# EAGLE board Płytka (EAGLE 9.6.2)
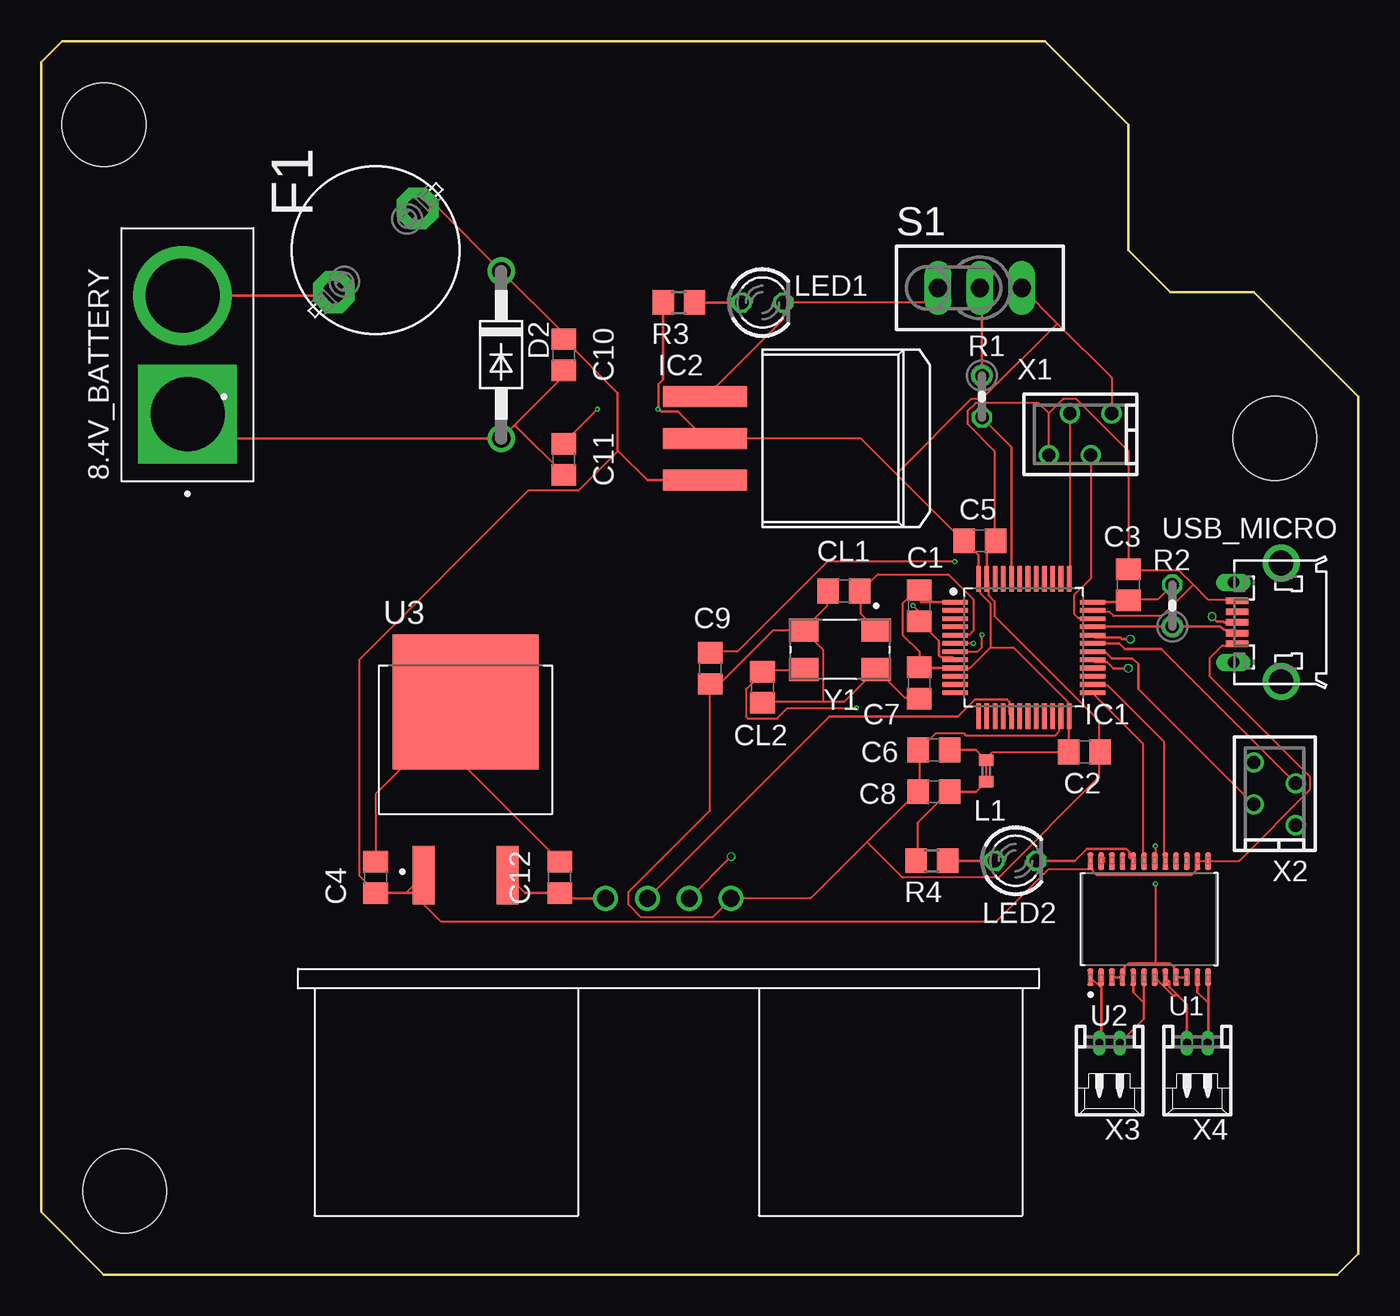
[diagram p0: board, top side]
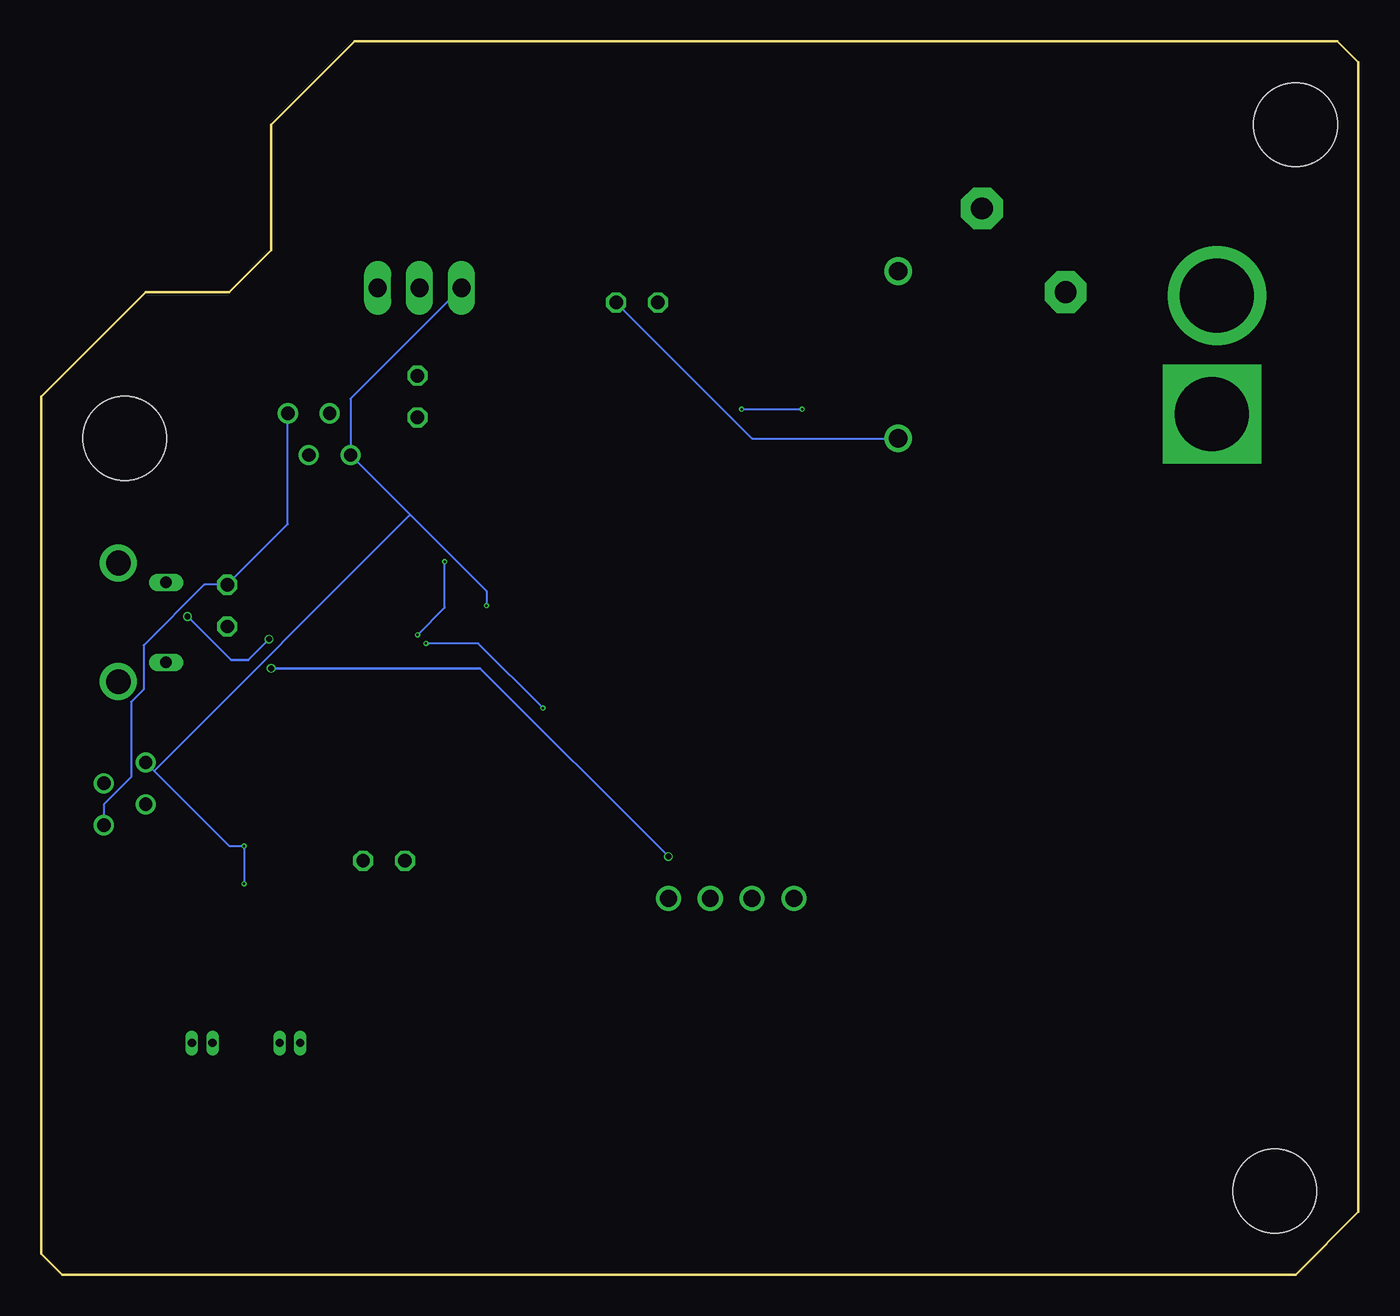
[diagram p1: board, bottom side, seen from below]

Size 80.01 x 74.93 mm. Coordinates in mm from the lower left corner, seen from the top.
Outline: 0,73.66 0,3.81 3.81,0 78.74,0 80.01,1.27 80.01,53.34 73.66,59.69 68.58,59.69 66.04,62.23 66.04,69.85 60.96,74.93 1.27,74.93 0,73.66
Copper layers (1*16): Top 0.035559375mm / dielectric 1.6mm / Bottom 0.035559375mm
Design rules "jlcpcb2layer *": minimum track width 5mil, minimum drill 0.15mm, track to track 5mil, track to pad 0.2mm, pad to pad 0.5mm, via to via 10mil, smd to smd 5mil, copper to edge 8mil, drill to drill 0.5mm, minimum pad ring 5mil, minimum via ring 3mil, stop-mask expansion 2.5mil, vias tented up to drill 0mil, thermal gap 10mil
Holes 5.08 mm at 5.08,5.08 3.81,69.85 74.93,50.8

## Footprints (pad centres in the part's own frame; a part is rotated, then mirrored left to right if it is on the bottom)
AMASS_XT60PB-M = drill 4.5 pad 6 square: 1 -3.6,0 | drill 4.5 pad 6: 2 3.6,0.305
C0805 = smd 1.3 x 1.5: 1 -0.95,0; 2 0.95,0
DO41-10 = drill 1.118: A 5.08,0; C -5.08,0
19559 = drill 1.321 pad 2.54 octagon: 1 -2.54,2.54; 2 2.54,-2.54
QFP50P900X900X160-48N = smd 1.559 x 0.28: 1 -4.178,2.75; 2 -4.178,2.25; 3 -4.178,1.75; 4 -4.178,1.25; 5 -4.178,0.75; 6 -4.178,0.25; 7 -4.178,-0.25; 8 -4.178,-0.75; 9 -4.178,-1.25; 10 -4.178,-1.75; 11 -4.178,-2.25; 12 -4.178,-2.75; 25 4.178,-2.75; 26 4.178,-2.25; 27 4.178,-1.75; 28 4.178,-1.25; 29 4.178,-0.75; 30 4.178,-0.25; 31 4.178,0.25; 32 4.178,0.75; 33 4.178,1.25; 34 4.178,1.75; 35 4.178,2.25; 36 4.178,2.75 | smd 0.28 x 1.559: 13 -2.75,-4.178; 14 -2.25,-4.178; 15 -1.75,-4.178; 16 -1.25,-4.178; 17 -0.75,-4.178; 18 -0.25,-4.178; 19 0.25,-4.178; 20 0.75,-4.178; 21 1.25,-4.178; 22 1.75,-4.178; 23 2.25,-4.178; 24 2.75,-4.178; 37 2.75,4.178; 38 2.25,4.178; 39 1.75,4.178; 40 1.25,4.178; 41 0.75,4.178; 42 0.25,4.178; 43 -0.25,4.178; 44 -0.75,4.178; 45 -1.25,4.178; 46 -1.75,4.178; 47 -2.25,4.178; 48 -2.75,4.178
DD-3 = smd 1.27 x 5.08: 1 -2.54,-7.938; 2 0,-7.938; 3 2.54,-7.938
0402 = smd 0.7 x 0.9: 1 -0.65,0; 2 0.65,0
LED3MM = drill 0.813 octagon: A -1.27,0; K 1.27,0
0204V = drill 0.813 octagon: 1 -1.27,0; 2 1.27,0
R0805 = smd 1.3 x 1.5: 1 -0.95,0; 2 0.95,0
TL3XPO = drill 1.1 pad 1.422 long: 1 -2.54,0; 2 0,0; 3 2.54,0
SSOP-24 = smd 1.06 x 0.37: 1 -3.525,3.575; 2 -3.525,2.925; 3 -3.525,2.275; 4 -3.525,1.625; 5 -3.525,0.975; 6 -3.525,0.325; 7 -3.525,-0.325; 8 -3.525,-0.975; 9 -3.525,-1.625; 10 -3.525,-2.275; 11 -3.525,-2.925; 12 -3.525,-3.575; 13 3.525,-3.575; 14 3.525,-2.925; 15 3.525,-2.275; 16 3.525,-1.625; 17 3.525,-0.975; 18 3.525,-0.325; 19 3.525,0.325; 20 3.525,0.975; 21 3.525,1.625; 22 3.525,2.275; 23 3.525,2.925; 24 3.525,3.575
XCVR_HC-SR04 = drill 1.02: 1 -3.81,0; 2 -1.27,0; 3 1.27,0; 4 3.81,0
D2PAK = smd 1.33 x 3.57: 1 -2.54,-6.47; 3 2.54,-6.47 | smd 8.87 x 8.19: 2 0,4.06
ZX62D-B-5PA8 = smd 1.35 x 0.4: 1 4.825,1.3; 2 4.825,0.65; 3 4.825,0; 4 4.825,-0.65; 5 4.825,-1.3 | drill 1.5: S1 2.15,-3.6; S2 2.15,3.6 | drill 0.7 long: S3 5.05,2.425; S4 5.05,-2.425
MTOP-4 = drill 0.813: 1 1.905,1.27; 2 0.635,-1.27; 3 -0.635,1.27; 4 -1.905,-1.27
53048-02 = drill 0.5 pad 0.698 long: 1 0.625,-1.25; 2 -0.625,-1.25
XTAL_ABMM2-8.0000MHZ-E1-T = smd 1.4 x 1.8: 1 -1.2,2.2; 2 -1.2,-2.2; 3 1.2,-2.2; 4 1.2,2.2

## Placement (x,y rotation side)
8.4V_BATTERY  XT60_PLUG  [AMASS_XT60PB-M]  8.89,55.88 90 top
C1  100nF  [C0805]  53.34,40.64 270 top
C2  100nF  [C0805]  63.37,31.75 0 top
C3  100nF  [C0805]  66.04,41.91 90 top
C4  0.33uF  [C0805]  20.32,24.13 90 top
C5  4.7uF  [C0805]  57.02,44.58 0 top
C6  1uF  [C0805]  54.23,31.88 180 top
C7  10nF\  [C0805]  53.34,35.94 270 top
C8  1uF  [C0805]  54.23,29.34 180 top
C9  0.1uF  [C0805]  40.64,36.83 270 top
C10  10uF  [C0805]  31.75,55.88 270 top
C11  10uF  [C0805]  31.75,49.53 270 top
C12  0.33uF  [C0805]  31.5,24.13 90 top
CL1  3pF  [C0805]  48.77,41.53 0 top
CL2  3pF  [C0805]  43.81,35.69 90 top
D2  [DO41-10]  27.94,55.88 270 top
F1  [19559]  20.32,62.23 90 top
IC1  STM32F103C6  [QFP50P900X900X160-48N]  59.69,38.1 0 top
IC2  REG1117F  [DD-3]  48.26,50.8 270 top
L1  BLM15HB121SN1  [0402]  57.4,30.61 270 top
LED1  RED  [LED3MM]  43.81,59.05 0 top
LED2  RED  [LED3MM]  59.18,25.15 0 top
R1  10k  [0204V]  57.15,53.34 270 top
R2  1k5  [0204V]  68.71,40.64 90 top
R3  1k5  [R0805]  38.73,59.05 180 top
R4  1k5  [R0805]  54.1,25.15 180 top
S1  TL32PO  [TL3XPO]  57.02,59.94 0 top
U1  TB6612FNG,C,8,EL  [SSOP-24]  67.31,21.59 90 top
U2  HC-SR04  [XCVR_HC-SR04]  38.1,22.86 0 top
U3  MC7805ACD2TG  [D2PAK]  25.78,30.73 0 top
USB_MICRO  ZX62D-B-5PA8  [ZX62D-B-5PA8]  77.47,39.62 180 top
X1  [MTOP-4]  63.12,51.05 180 top
X2  [MTOP-4]  74.93,29.21 90 top
X3  MOTOR1  [53048-02]  64.9,12.83 180 top
X4  MOTOR2  [53048-02]  70.23,12.83 180 top
Y1  8MHz  [XTAL_ABMM2-8.0000MHZ-E1-T]  48.51,37.97 270 top

## Library data of the parts
8.4V_BATTERY = XT60_YELLOW; AVAILABILITY: Not in stock; DESCRIPTION: Power connector; 65A; PIN: 2; Colour: yellow; MF: Pololu; MP: XT60 YELLOW; PACKAGE: None; PRICE: None
C1-C12 CL1 CL2 = rcl; SPICEPREFIX: C
D2 = diode
F1 = fuse; MPN: 55900000001; OC_FARNELL: 9516360; OC_NEWARK: 02P0286
IC1 = IC_Embedded; CATEGORY: IC_Embedded; MANUFACTURER: ST Microelectronics; MPN: STM32F103C6T7A; OPERATING_TEMP: -40 to 105 °C; PART_STATUS: Active; SUB-CATEGORY: Microcontroller; THERMALLOSS: 0.44W
IC2 = burr-brown; MF: TEXAS INSTRUMENTS; MPN: REG1117FAKTTT; OC_FARNELL: 1296120; OC_NEWARK: 87H2562
L1 = inductors
LED1 LED2 = led
R1-R4 = rcl; SPICEPREFIX: R
S1 = switch
U1 = IC; CREATED_BY: PCBLayout.com; DIGI-KEY_PART: TB6612FNGC8ELCT-ND; MANUFACTURER: Toshiba Semiconductor and Storage; MPN: TB6612FNG,C,8,EL; PACKAGE: SSOP-24
U2 = HC-SR04; AVAILABILITY: In Stock; DESCRIPTION: HC-SR04 Ultrasonic Sensor - Platform Evaluation Expansion Board; MF: OSEPP Electronics; MP: HC-SR04; PACKAGE: None; PRICE: None; PURCHASE-URL: https://pricing.snapeda.com/search/part/HC-SR04/?ref=eda
U3 = IC; CREATED_BY: PCBLayout.com; DIGIKEY_PART_NUMBER: MC7805ACD2TGOS-ND; MANUFACTURER: ON Semiconductor; MPN: MC7805ACD2TG; PACKAGE: D2PAK
USB_MICRO = zx62d-b-5pa8-oshpark_10; MF: Hirose; MPN: ZX62D-B-5PA8; OC_FARNELL: 2300438; OC_NEWARK: 69W0712
X1 X2 = con-amp
X3 X4 = con-molex; MF: MOLEX; MPN: 53048-0210; OC_FARNELL: 1012259; OC_NEWARK: 57H4718
Y1 = ABMM2-8.0000MHZ-E1-T; AVAILABILITY: In Stock; DESCRIPTION: Crystals 8MHz 18pF 10PPM -20 +70C; MF: Abracon; MP: ABMM2-8.0000MHZ-E1-T; PACKAGE: Package; PRICE: None

## Nets
5V: C12.1 U2.1 U3.3
8.4V: 8.4V_BATTERY.2 F1.1
+3V3: C1.1 C2.1 C3.1 C5.1 C6.1 C7.1 C8.1 C11.1 IC1.1 IC1.9 IC1.24 IC1.36 IC1.48 IC2.2 L1.1 L1.2 R2.2 R3.2 R4.2 S1.3 X1.4 X2.4
AIN1: IC1.46
AIN2: IC1.45
AO1: U1.1 U1.2 X3.1
AO2: U1.5 U1.6 X3.2
BIN1: IC1.26 U1.17
BIN2: IC1.22
BO1: U1.11 U1.12 X4.2
BO2: U1.7 U1.8 X4.1
BOOT0: IC1.44 R1.2
ECHO: IC1.29 U2.3
GND: 8.4V_BATTERY.1 C1.2 C2.2 C3.2 C5.2 C6.2 C7.2 C8.2 C9.2 C10.2 C11.2 CL1.1 CL2.1 D2.A IC1.8 IC1.23 IC1.35 IC1.47 IC2.1 LED1.K S1.1 U1.3 U1.4 U1.9 U1.10 U1.18 U2.4 USB_MICRO.5 X1.1 X2.1 Y1.2 Y1.4
GND1: C4.2 C12.2 U3.2
N$2: LED1.A R3.1
N$3: U1.23
N$6: U1.22
N$7: LED2.A R4.1
N$15: U1.15
N$16: U1.16
NRST: C9.1 IC1.7
OSC_IN: CL1.2 IC1.5 Y1.1
OSC_OUT: CL2.2 IC1.6 Y1.3
PWMA: IC1.27
PWMB: IC1.28
STBY: IC1.25 U1.19
SW_BOOT0: R1.1 S1.2
SWCLK: IC1.37 X1.2
SWDID: IC1.34 X1.3
TRIG: IC1.17 U2.2
USART1_RX: IC1.31 X2.2
USART1_TX: IC1.30 X2.3
USB_D+: IC1.33 R2.1 USB_MICRO.2
USB_D-: IC1.32 USB_MICRO.3
V+: C4.1 C10.1 D2.C F1.2 IC2.3 U1.13 U1.14 U1.24 U3.1 USB_MICRO.1
VCC: LED2.K U1.20

## Tracks (layer width: path | path; a pad name or v marks a point on that pad's centre or on a via)
5V
  Top 0.152: U3.3 29.41,23.18 C12.1 31.82,22.86 U2.1
8.4V
  Top 0.152: 8.4V_BATTERY.2 17.57,59.48 F1.1
+3V3  (via drill 0.15)
  Top 0.127: X1.4 65.02,54.48 61.72,57.78 | S1.3 61.72,57.78 | R2.2 67.82,41.02 66.04,41.02 C3.1 | R4.2 53.21,25.15 53.21,27.43 55.12,29.34 C8.1 | L1.2 L1.1 57.4,31.37 57.78,31.75 C2.1 | v33.78,52.58 31.75,50.55 C11.1 | v37.47,52.58 37.51,52.59 | C7.1 53.34,37.85 52.32,38.86 52.32,40.77 52.7,41.15 53.34,41.15 C1.1 | 57.66,38.1 56.39,36.83 55.63,36.83 IC1.9 | 57.66,38.1 57.66,40.77 57.02,41.4 57.02,42.16 IC1.48 | IC2.2 49.78,50.8 51.94,48.64 | 51.94,48.64 56.01,44.58 C5.1 | 57.66,38.1 59.06,38.1 62.36,34.8 62.36,34.04 IC1.24 | 61.72,57.78 57.15,53.21 56.52,53.21 51.94,48.64
  Top 0.152: C1.1 53.45,40.85 IC1.1 | IC1.48 56.94,43.71 C5.1 | C7.1 53.38,36.85 IC1.9 | IC1.36 65.93,40.85 C3.1 | C2.1 62.42,33.16 62.44,33.18 IC1.24 | C6.1 56.78,31.88 L1.1 | C8.1 56.78,29.34 L1.2 | R3.2 37.78,54.37 37.51,54.09 37.51,52.59 37.67,52.43 38.69,52.43 IC2.2
  Bottom 0.127: X2.4 76.2,28.57 74.55,30.23 74.55,34.8 73.79,35.56 73.79,38.23 70.1,41.91 R2.2 65.02,45.59 X1.4 | v37.47,52.58 v33.78,52.58
AO1
  Top 0.152: U1.2 64.39,17.42 | 64.39,17.42 64.39,14.19 X3.1 | U1.1 64.39,17.42
AO2
  Top 0.152: U1.6 66.98,16.51 | 66.98,16.51 66.98,15.54 X3.2 | U1.5 66.33,17.16 66.98,16.51
BIN1
  Top 0.127: U1.17 68.2,25.15 68.2,32.39 64.77,35.81 63.88,35.81 IC1.26
BO1
  Top 0.152: U1.12 70.89,16.51 | 70.89,16.51 70.89,14.11 X4.2 | U1.11 70.23,17.16 70.89,16.51
BO2
  Top 0.152: U1.8 68.52,17.83 68.52,17.49 69.04,16.97 | X4.1 69.61,16.41 69.04,16.97 | U1.7 68.73,16.97 69.04,16.97
BOOT0
  Top 0.152: R1.2 58.94,50.28 IC1.44
ECHO  (via drill 0.35)
  Top 0.152: U2.3 v41.91,25.4 | IC1.29 64,37.22 64.74,37.22 65.13,36.83 v66.04,36.83
  Bottom 0.152: v41.91,25.4 53.34,36.83 v66.04,36.83
GND  (via drill 0.15)
  Top 0.127: 47.5,34.8 48.77,34.8 50.67,36.7 Y1.4 50.8,36.7 52.45,35.05 53.34,35.05 C7.2 | 47.5,34.8 43.81,34.8 CL2.1 | Y1.2 46.23,39.12 44.45,39.12 41.27,35.94 40.64,35.94 C9.2 40.64,28.19 35.69,23.24 35.69,22.48 36.45,21.72 40.77,21.72 U2.4 46.74,22.86 50.16,26.29 | CL1.1 47.75,41.53 47.75,40.64 46.36,39.24 Y1.2 | 47.5,34.8 47.5,37.97 46.36,39.12 Y1.2 | 53.34,31.88 53.34,29.34 C8.2 53.21,29.34 50.16,26.29 | 53.34,31.88 54.36,32.89 56.01,32.89 56.13,32.77 61.59,32.77 61.85,33.02 61.85,33.91 IC1.23 | 53.34,31.88 C6.2 | 28.7,51.56 28.83,51.56 31.75,48.64 C11.2 | IC2.1 40.39,53.34 45.09,58.04 LED1.K 53.59,59.05 S1.1 | 67.69,18.92 68.58,18.92 68.83,18.67 68.83,18.16 U1.9 | 67.69,18.92 66.04,18.92 65.79,18.67 65.79,18.16 U1.4 | v67.69,26.04 67.69,25.15 U1.18 | v67.69,23.75 67.69,18.92 | 64.26,31.75 64.26,33.66 57.91,40 57.91,40.89 57.53,41.27 57.53,42.16 IC1.47 | 69.98,41.91 69.09,42.8 66.04,42.8 C3.2 66.04,50.04 62.86,53.21 62.1,53.21 61.21,52.32 | 69.98,41.91 70.87,41.02 72.64,41.02 USB_MICRO.5 | 69.98,41.91 68.07,40 65.15,40 64.9,40.26 63.88,40.26 IC1.35 | C1.2 53.34,40.26 v52.96,40.64 | X1.1 61.21,52.32 | 61.21,52.32 60.58,52.96 56.77,52.96 56.26,52.45 56.26,51.69 57.91,50.04 57.91,44.58 C5.2 | 50.16,26.29 52.32,24.13 58.17,24.13 64.26,30.23 64.26,31.75 | 64.26,31.75 C2.2
  Top 0.152: 8.4V_BATTERY.1 10.37,50.8 D2.A 28.7,51.56 31.75,54.61 C10.2 | U1.3 U1.4 | U1.9 U1.10 | C5.2 57.44,44.04 IC1.47 | C1.2 54.53,38.5 54.53,37.63 54.65,37.51 55.36,37.51 IC1.8
  Bottom 0.127: D2.A 36.83,50.8 LED1.K | X2.1 73.15,30.61 | 73.15,30.61 68.58,26.04 v67.69,26.04 v67.69,23.75 | S1.1 61.21,53.21 X1.1 57.53,46.1 | v52.96,40.64 52.96,41.53 57.53,46.1 | 73.15,30.61 57.66,46.1 57.53,46.1
GND1
  Top 0.127: C4.2 20.32,29.21 23.88,32.77 | 23.88,32.77 25.78,34.67 U3.2 23.88,32.77 | 23.88,32.77 31.5,25.15 C12.2
N$2
  Top 0.152: R3.1 LED1.A
N$3
  Top 0.152: 64.57,25.11 U1.23 64.57,25.3
N$7
  Top 0.152: LED2.A R4.1
NRST  (via drill 0.15)
  Top 0.127: v55.5,43.31 47.75,43.31 42.29,37.85 40.64,37.85 C9.1 | v57.15,38.86 57.15,38.1 56.9,37.85 55.63,37.85 IC1.7
  Bottom 0.127: v55.5,43.31 55.5,40.51 v57.15,38.86
OSC_IN
  Top 0.127: 49.78,41.53 49.78,40.13 50.67,39.24 Y1.1 | 49.78,41.53 50.8,42.55 55.12,42.55 56.64,41.02 56.64,39.12 56.39,38.86 55.63,38.86 IC1.5 | 49.78,41.53 CL1.2
OSC_OUT  (via drill 0.15)
  Top 0.127: Y1.3 46.23,36.7 43.81,36.7 CL2.2 43.81,36.58 42.8,35.56 42.8,33.91 42.93,33.78 44.7,33.78 45.34,34.42 v49.53,34.42 | v56.64,38.35 55.63,38.35 IC1.6
  Bottom 0.127: v56.64,38.35 53.47,38.35 v49.53,34.42
STBY
  Top 0.127: U1.19 66.93,25.15 66.93,32.26 63.88,35.31 IC1.25
SW_BOOT0
  Top 0.152: S1.2 57.15,59.82 R1.1
SWCLK
  Top 0.127: X1.2 62.48,42.29 IC1.37
SWDID
  Top 0.127: X1.3 63.75,42.29 62.74,41.27 62.74,40.13 62.99,39.88 63.75,39.88 IC1.34
TRIG
  Top 0.152: U2.2 47.89,33.92 55.7,33.92 56.7,34.93 58.67,34.93 58.81,34.8 58.81,34.05 IC1.17
USART1_RX
  Top 0.152: IC1.31 65.49,38.35 65.83,38 68.04,38 X2.2
USART1_TX
  Top 0.152: X2.3 66.65,35.59 66.65,37.08 66.29,37.44 65.02,37.44 64.61,37.85 IC1.30
USB_D+
  Top 0.152: IC1.33 63.89,39.37 R2.1 71.63,39.37 71.86,39.15 72.47,39.15 USB_MICRO.2
USB_D-  (via drill 0.35)
  Top 0.152: USB_MICRO.3 71.88,39.62 71.83,39.67 71.42,39.67 v71.12,39.98 | IC1.32 64,38.72 65.55,38.72 65.66,38.61 v66.17,38.61
  Bottom 0.152: v71.12,39.98 68.48,37.34 67.44,37.34 v66.17,38.61
V+
  Top 0.127: 63.75,24.64 63.75,25.02 U1.24 63.75,24.64 | 63.75,24.64 64.14,24.26 69.85,24.26 70.23,24.64 70.23,25.02 U1.14 70.36,25.15 70.87,25.15 U1.13 70.99,25.15 72.77,25.15 77.09,29.46 77.09,30.23 70.99,36.32 70.99,37.46 71.75,38.23 72.64,38.23 USB_MICRO.1 | C4.1 20.32,23.24 19.3,24.26 19.3,37.34 29.59,47.62 32.64,47.62 35.05,50.03 35.05,50.04 | 63.75,24.64 61.21,24.64 58.04,21.46 24.26,21.46 22.86,22.86 U3.1
  Top 0.152: 22.86,22.86 22.54,23.18 C4.1 22.16,23.18 U3.1 | F1.2 24.13,64.77 D2.C 31.75,57.15 C10.1 35.01,53.57 35.01,50.07 35.05,50.03 36.82,48.26 IC2.3
VCC
  Top 0.152: LED2.K 62.78,25.15 63.51,25.87 65.91,25.87 66.1,25.69 66.1,25.35 U1.20